# Allegro board VESC_DEVICE.brd
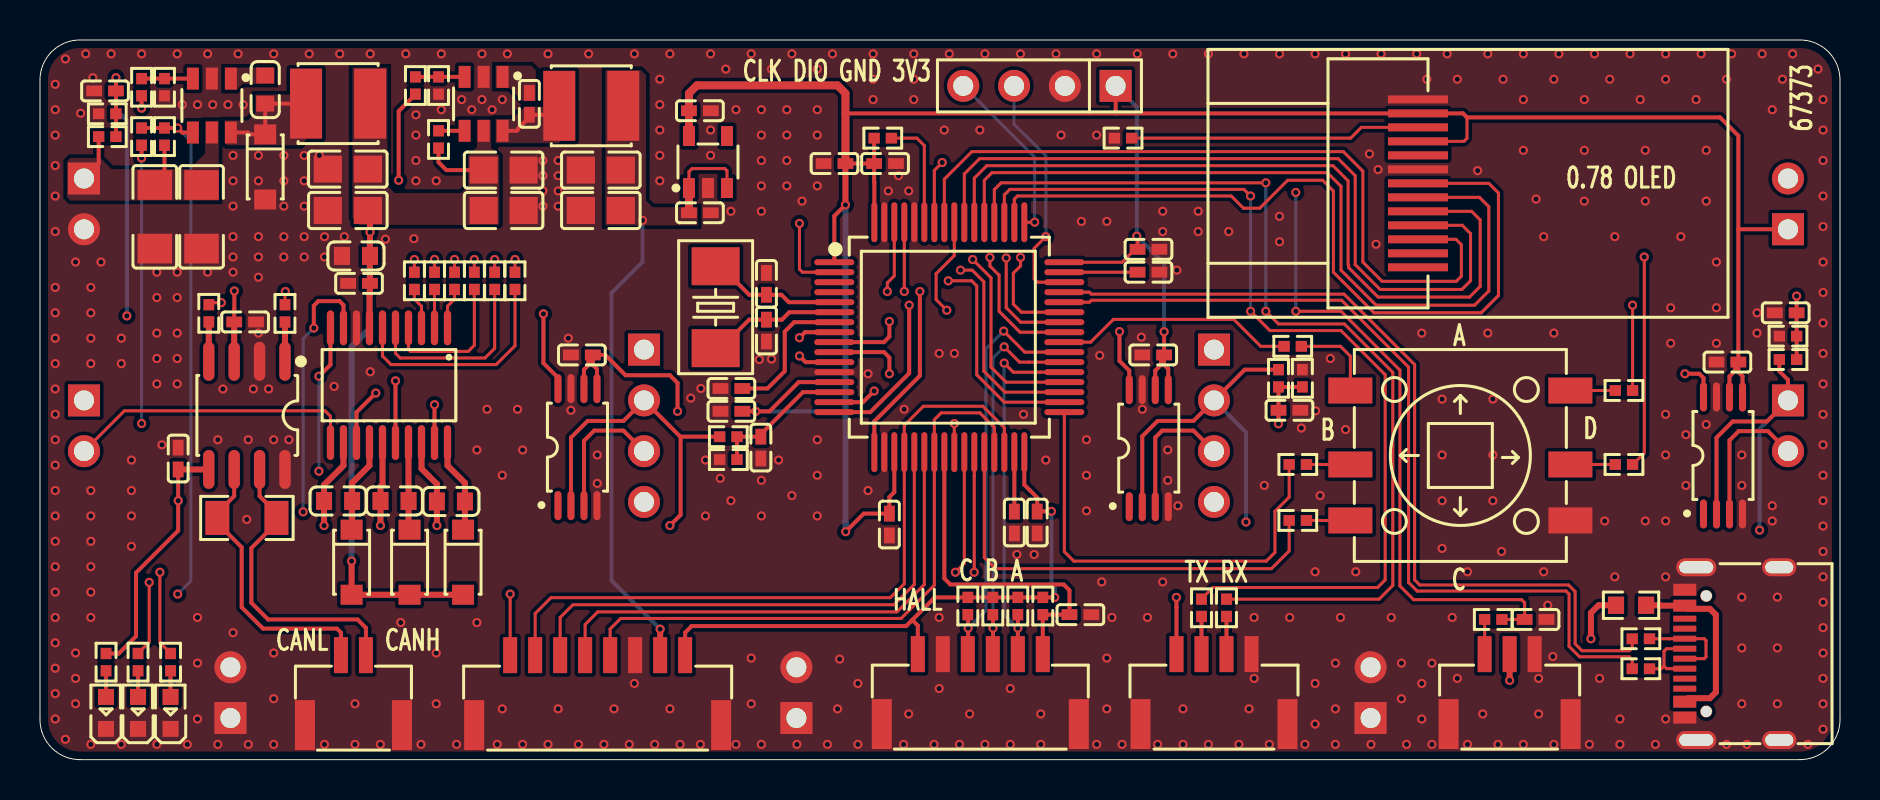
[diagram p0: board, top side]
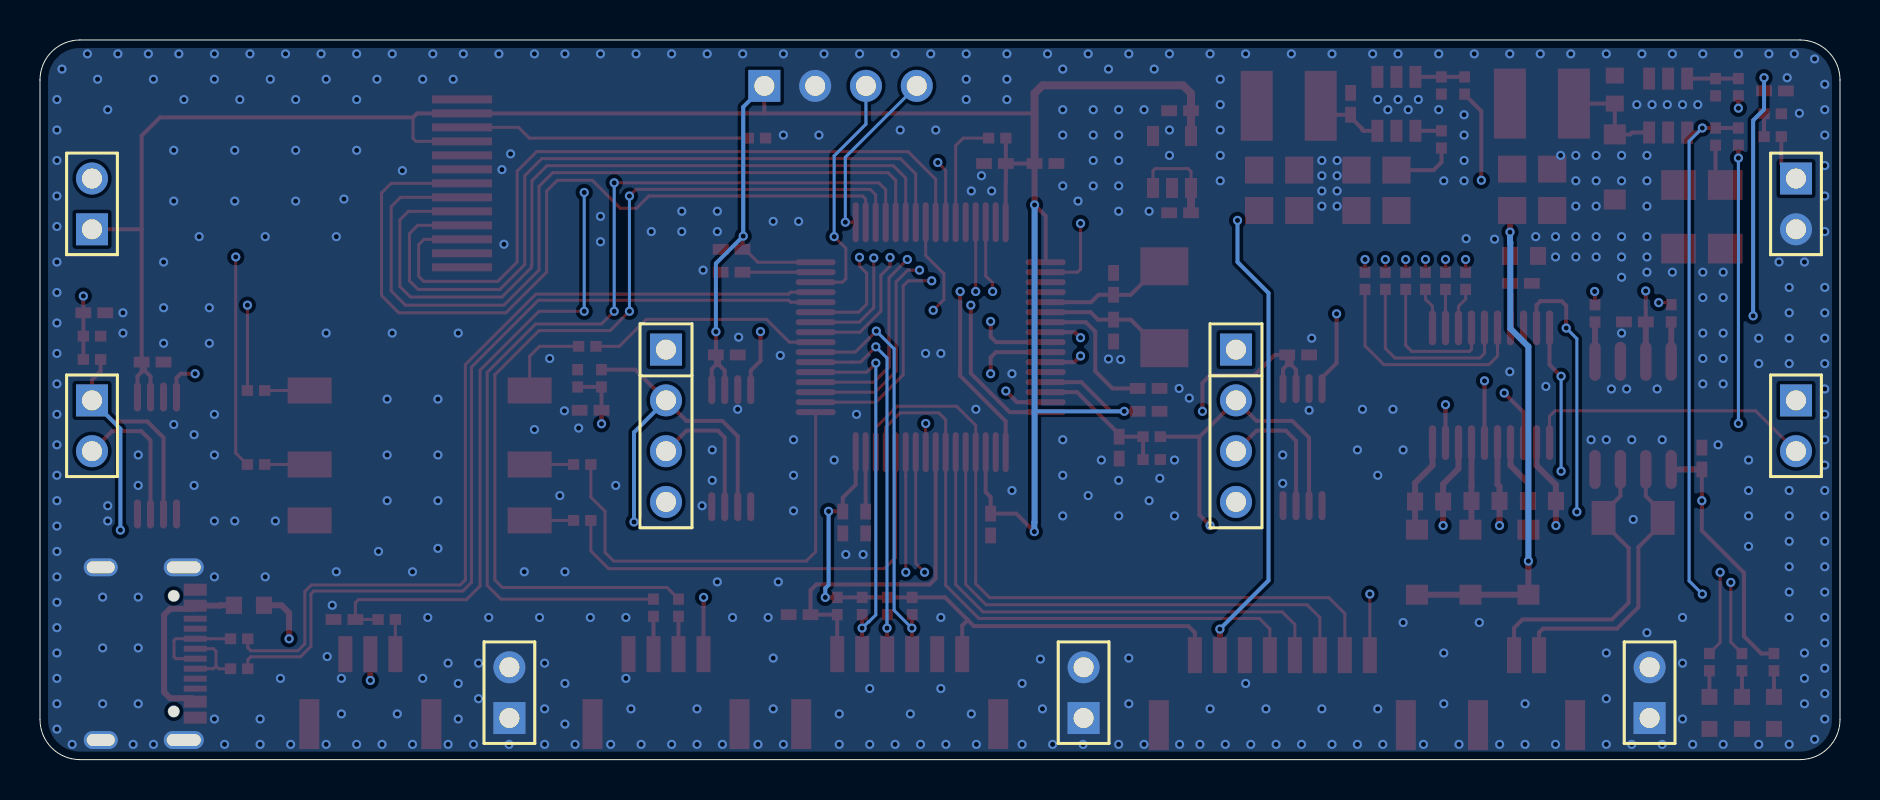
[diagram p1: board, bottom side, seen from below]

Outline 90 x 36 mm; copper layers: TOP, LAYER_1, LAYER_2, BOTTOM. Coordinates in mm from the lower left corner of the outline.
Outline path: 0,34 0,2 arc(0.59,0.59) 2,0 88,0 arc(89.41,0.59) 90,2 90,34 arc(89.41,35.41) 88,36 2,36 arc(0.59,35.41) 0,34

## Design rules (mm)
constraint set DEFAULT: min track width 0.152
net group USB: nets USB_DM USB_DP

## Placement (name value [footprint] x y rotation side)
C1  15pF/50V  [C0402]  36.32 23.8 270 top
C2  15pF/50V  [C0402]  36.32 21.46 90 top
C3  2.2uF/50V  [C0603]  14.9 12.94 0 top
C4  2.2uF/50V  [C0603]  17.73 12.94 0 top
C5  100nF/50V  [C0402]  34.57 18.57 180 top
C6  2.2uF/50V  [C0603]  20.55 12.91 0 top
C7  10uF/16V  [C0603]  15.8 25.2 0 top
C8  2.2uF/6.3V  [C0402]  55.42 25.53 180 top
C9  2.2uF/6.3V  [C0402]  42.47 11.76 90 top
C10  2.2uF/6.3V  [C0402]  34.57 17.42 0 top
C11  2.2uF/6.3V  [C0402]  49.86 11.86 90 top
C12  2.2nF/50V  [C0402]  27.09 20.24 0 top
C13  2.2uF/6.3V  [C0402]  42.25 29.82 180 top
C14  2.2uF/6.3V  [C0402]  39.73 29.82 0 top
C15  2.2nF/50V  [C0402]  55.66 20.24 0 top
C16  2.2uF/6.3V  [C0402]  48.72 11.86 270 top
C17  2.2uF/6.3V  [C0402]  55.42 24.38 0 top
C18  2.2nF/50V  [C0402]  84.37 19.89 0 top
C19  NC  [C0402]  36.04 15.61 90 top
C20  NC  [C0402]  62.47 17.48 180 top
C21  NC  [C0402]  87.29 22.35 0 top
C22  100nF/50V  [C0402]  3.25 33.45 0 top
C23  10nF/50V  [C0402]  24.47 32.8 90 top
C24  100nF/100V  [C0603]  11.26 33.52 90 top
C25  22uF/16V  [C0805]  23.18 29.49 0 top
C26  2.2uF/100V  [C1206]  5.74 27.15 270 top
C27  2.2uF/100V  [C1206]  8.08 27.15 270 top
C28  22uF/6.3V  [C0805]  28.04 27.47 180 top
C29  22uF/6.3V  [C0805]  28.04 29.49 180 top
C30  10uF/6.3V  [C0402]  32.99 27.36 0 top
C31  22uF/16V  [C0805]  15.39 29.54 180 top
C32  22uF/16V  [C0805]  15.39 27.47 180 top
C33  10uF/6.3V  [C0402]  32.99 32.46 0 top
C34  100nF/50V  [C0402]  74.78 7.01 180 top
C35  100nF/50V  [C0402]  52.02 7.25 0 top
C36  2.2uF/6.3V  [C0402]  10.26 21.89 180 top
C37  2.2uF/6.3V  [C0402]  6.91 15.06 90 top
C38  22uF/16V  [C0805]  23.18 27.47 0 top
C39  100nF/50V  [C0402]  15.95 23.83 0 top
CON1  OLED  [0_78OLED]  68.9 28.83 0 top
D1  DSK310  [SOD-123F]  15.58 9.88 270 top
D2  DSK310  [SOD-123F]  18.48 9.88 270 top
D3  DSK310  [SOD-123F]  21.15 9.88 270 top
D4  LED_GREEN  [LED0603]  6.53 2.34 90 top
D5  LED_RED  [LED0603]  4.9 2.34 90 top
D6  LED_BLUE  [LED0603]  3.3 2.34 90 top
D7  DSK310  [SOD-123F]  11.26 29.65 270 top
J1  4 HEADER  [ISP-4P-2_54]  49.97 33.7 180 top
J2  -  [TYPE-C_16P]  84.6 5.3 90 top
J3  1.25-4PWTDK  [SMD-4P-1_25]  58.7 3.53 0 top
J4  1.25-3PWTDK  [SMD-3P-1_25]  73.48 3.53 0 top
J5  1.25-6PWTDK  [SMD-6P-1_25]  47.02 3.53 0 top
J6  1.25-8PWTDK  [SMD-8P-1_25]  27.88 3.48 0 top
J7  1.25-2PWTDK  [SMD-2P-1_25]  15.67 3.48 0 top
J12  CON2  [PZ-2P-2_54]  2.2 27.8 270 bottom
J13  CON4  [PZ-4P-2_54]  30.2 16.7 270 bottom
J14  CON2  [PZ-2P-2_54]  87.4 27.8 90 bottom
J15  CON4  [PZ-4P-2_54]  58.7 16.7 270 bottom
J16  CON2  [PZ-2P-2_54]  87.4 16.7 270 bottom
J17  CON2  [PZ-2P-2_54]  2.2 16.7 270 bottom
J18  CON2  [PZ-2P-2_54]  9.52 3.35 90 bottom
J19  CON2  [PZ-2P-2_54]  37.82 3.35 90 bottom
J20  CON2  [PZ-2P-2_54]  66.53 3.35 90 bottom
L1  22uH_1A  [L4020]  14.9 32.82 0 top
L2  2.2uH_2A  [L4020]  27.56 32.71 0 top
R1  0R/1%  [R0402]  18.72 23.95 90 top
R2  0R/1%  [R0402]  23.75 23.95 90 top
R3  0R/1%  [R0402]  19.73 23.95 90 top
R4  0R/1%  [R0402]  22.73 23.95 90 top
R5  0R/1%  [R0402]  20.73 23.95 90 top
R6  0R/1%  [R0402]  21.72 23.95 90 top
R7  10K/1%  [R0402]  42.14 31.09 180 top
R11  39K/1%  [R0402]  34.42 16.15 180 top
R12  39K/1%  [R0402]  61.93 19.08 90 top
R13  39K/1%  [R0402]  87.4 20.02 180 top
R14  39K/1%  [R0402]  3.37 31.17 180 top
R15  2.2K/1%  [R0402]  6.53 4.88 270 top
R16  2.2K/1%  [R0402]  34.42 15.01 0 top
R17  2.2K/1%  [R0402]  4.9 4.88 270 top
R18  2.2K/1%  [R0402]  63.12 19.08 270 top
R19  2.2K/1%  [R0402]  87.4 21.18 0 top
R20  2.2K/1%  [R0402]  3.37 32.31 0 top
R21  2.2K/1%  [R0402]  3.3 4.88 270 top
R22  100K/1%  [R0402]  6.22 31.17 270 top
R23  120K/1%  [R0402]  5.08 33.64 270 top
R24  100K/1%  [R0402]  19.93 31.02 90 top
R25  100K/1%  [R0402]  18.77 33.72 270 top
R26  8.2K/1%  [R0402]  6.22 33.64 90 top
R27  13.7K/1%  [R0402]  19.93 33.72 90 top
R28  NC  [R0603]  79.55 7.72 180 top
R29  22R/1%  [R0402]  58.08 7.59 90 top
R30  22R/1%  [R0402]  59.32 7.59 90 top
R31  22R/1%  [R0402]  80.04 6.05 180 top
R32  22R/1%  [R0402]  80.04 4.55 180 top
R33  100R/1%  [R0402]  72.66 7.01 0 top
R34  10K/1%  [R0402]  50.14 7.68 90 top
R35  4.7K/1%  [R0402]  48.89 7.68 90 top
R36  4.7K/1%  [R0402]  47.64 7.68 90 top
R37  4.7K/1%  [R0402]  46.39 7.68 90 top
R38  NC_10K/1%  [R0402]  5.08 31.17 90 top
R39  120R/1%  [R1206]  10.34 12.09 180 top
R40  0R/1%  [R0402]  12.25 22.32 90 top
R41  0R/1%  [R0402]  8.44 22.33 90 top
R42  10R/1%  [R0402]  54.15 31.09 180 top
R43  100R/1%  [R0402]  62.64 20.68 180 top
R44  100R/1%  [R0402]  62.89 14.76 180 top
R45  100R/1%  [R0402]  62.89 11.96 180 top
R46  100R/1%  [R0402]  79.2 14.76 180 top
R47  100R/1%  [R0402]  79.2 18.46 180 top
SW1  SW_TM_2027  [SW_SMD_6P_10X10]  71.02 15.21 0 top
U1  STM32F405RGT6  [LQFP64_10X10_05P]  45.47 21.13 270 top
U2  FD6288T  [TSSOP-20]  17.45 18.73 180 top
U3  INA240A1PWR  [TSSOP-8]  26.87 15.63 0 top
U4  INA240A1PWR  [TSSOP-8]  55.44 15.58 0 top
U5  INA240A1PWR  [TSSOP-8]  84.15 15.21 0 top
U6  LMR16006XDDCR  [SOT-23-6]  8.59 32.72 90 top
U7  LP6460B6F  [SOT-23-6]  22.18 32.8 90 top
U8  XC6219B332MR  [SOT-23-5]  33.4 29.9 270 top
U9  TJA1042T/1J  [SOP-8]  10.34 17.22 180 top
Y1  8M  [SMD5032-2P]  33.78 22.63 90 top

## Library data of the parts
C1-C39 = CAP NP
CON1 = OLED
D1-D3 D7 = DIODE SCHOTTKY21
D4-D6 = LED
J1 = 4 HEADER
J2 = TYPE-C_16P
J3 = 1.25-4PWTDK
J4 = 1.25-3PWTDK
J5 = 1.25-6PWTDK
J6 = 1.25-8PWTDK
J7 = 1.25-2PWTDK
J12 J14 J16-J20 = CON2
J13 J15 = CON4
L1 L2 = INDUCTOR
R1-R7 R11-R47 = RESISTOR
SW1 = SW_TM_2027
U1 = STM32F405RGT6
U2 = FD6288T
U3-U5 = INA240A1PWR
U6 = LMR16006XDDCR
U7 = LP6460B6F
U8 = XC6219B332MR
U9 = TJA1042T/1J
Y1 = CRYSTAL

## Footprints (pads in the part's own frame, mm; a bottom-side part is the same pattern mirrored in y, then rotated)
0_78OLED
  rect 3x0.4 smd: 1(0,-4.2) 2(0,-3.5) 3(0,-2.8) 4(0,-2.1) 5(0,-1.4) 6(0,-0.7) 7(0,0) 8(0,0.7) 9(0,1.4) 10(0,2.1) 11(0,2.8) 12(0,3.5) 13(0,4.2)
C0402
  rect 0.79x0.541 smd: 1(-0.546,0) 2(0.546,0)
C0603
  rect 0.8x0.899 smd: 1(-0.701,0) 2(0.701,0)
C0805
  rect 1.41x1.349 smd: 1(-1.001,0) 2(1.001,0)
C1206
  rect 1.486x1.727 smd: 1(-1.593,0) 2(1.59,0)
ISP-4P-2_54
  rect 1.6x1.6 hole 1: 1(-3.81,0)
  round 1.6 hole 1: 2(-1.27,0) 3(1.27,0) 4(3.81,0)
L4020
  rect 1.6x3.5 smd: 1(-1.6,0) 2(1.6,0)
LED0603
  rect 0.8x0.8 smd: 1(-0.8,0) 2(0.8,0)
LQFP64_10X10_05P
  oval 0.3x1.999 smd: 1(-3.749,-5.751) 2(-3.251,-5.751) 3(-2.751,-5.751) 4(-2.25,-5.751) 5(-1.75,-5.751) 6(-1.25,-5.751) 7(-0.749,-5.751) 8(-0.249,-5.751) 9(0.249,-5.751) 10(0.749,-5.751) 11(1.25,-5.751) 12(1.75,-5.751) 13(2.25,-5.751) 14(2.751,-5.751) 15(3.251,-5.751) 16(3.749,-5.751) 33(3.749,5.751) 34(3.251,5.751) 35(2.751,5.751) 36(2.25,5.751) 37(1.75,5.751) 38(1.25,5.751) 39(0.749,5.751) 40(0.249,5.751) 41(-0.249,5.751) 42(-0.749,5.751) 43(-1.25,5.751) 44(-1.75,5.751) 45(-2.25,5.751) 46(-2.751,5.751) 47(-3.251,5.751) 48(-3.749,5.751)
  oval 1.999x0.3 smd: 17(5.751,-3.749) 18(5.751,-3.251) 19(5.751,-2.751) 20(5.751,-2.25) 21(5.751,-1.75) 22(5.751,-1.25) 23(5.751,-0.749) 24(5.751,-0.249) 25(5.751,0.249) 26(5.751,0.749) 27(5.751,1.25) 28(5.751,1.75) 29(5.751,2.25) 30(5.751,2.751) 31(5.751,3.251) 32(5.751,3.749) 49(-5.751,3.749) 50(-5.751,3.251) 51(-5.751,2.751) 52(-5.751,2.25) 53(-5.751,1.75) 54(-5.751,1.25) 55(-5.751,0.749) 56(-5.751,0.249) 57(-5.751,-0.249) 58(-5.751,-0.749) 59(-5.751,-1.25) 60(-5.751,-1.75) 61(-5.751,-2.25) 62(-5.751,-2.751) 63(-5.751,-3.251) 64(-5.751,-3.749)
PZ-2P-2_54
  rect 1.6x1.6 hole 1: 1(-1.27,0)
  round 1.6 hole 1: 2(1.27,0)
PZ-4P-2_54
  rect 1.6x1.6 hole 1: 1(-3.81,0)
  round 1.6 hole 1: 2(-1.27,0) 3(1.27,0) 4(3.81,0)
R0402
  rect 0.566x0.541 smd: 1(-0.432,0) 2(0.432,0)
R0603
  rect 0.805x0.864 smd: 1(-0.752,0) 2(0.752,0)
R1206
  rect 1.199x1.699 smd: 1(-1.478,0) 2(1.478,0)
SMD5032-2P
  rect 1.9x2.4 smd: 1(-2.05,0) 2(2.05,0)
SMD-2P-1_25
  rect 0.701x1.801 smd: 1(-0.625,1.75) 2(0.625,1.75)
  rect 1.001x2.499 smd: 3(-2.426,-1.75) 4(2.426,-1.75)
SMD-3P-1_25
  rect 0.701x1.801 smd: 1(-1.25,1.75) 2(0,1.75) 3(1.25,1.75)
  rect 1.001x2.499 smd: 4(-3.05,-1.75) 5(3.05,-1.75)
SMD-4P-1_25
  rect 0.701x1.801 smd: 1(-1.875,1.75) 2(-0.625,1.75) 3(0.625,1.75) 4(1.875,1.75)
  rect 1.001x2.499 smd: 5(-3.675,-1.75) 6(3.675,-1.75)
SMD-6P-1_25
  rect 0.701x1.801 smd: 1(-3.124,1.75) 2(-1.875,1.75) 3(-0.625,1.75) 4(0.625,1.75) 5(1.875,1.75) 6(3.124,1.75)
  rect 1.001x2.499 smd: 7(-4.925,-1.75) 8(4.925,-1.75)
SMD-8P-1_25
  rect 0.701x1.801 smd: 1(-4.374,1.75) 2(-3.124,1.75) 3(-1.875,1.75) 4(-0.625,1.75) 5(0.625,1.75) 6(1.875,1.75) 7(3.124,1.75) 8(4.374,1.75)
  rect 1.001x2.499 smd: 9(-6.175,-1.75) 10(6.175,-1.75)
SOD-123F
  rect 1.001x1.1 smd: 1(-1.628,0) 2(1.628,0)
SOP-8
  oval 0.569x1.951 smd: 1(-1.905,-2.705) 2(-0.635,-2.705) 3(0.635,-2.705) 4(1.905,-2.705) 5(1.905,2.705) 6(0.635,2.705) 7(-0.635,2.705) 8(-1.905,2.705)
SOT-23-5
  rect 1.001x0.599 smd: 1(1.3,-0.95) 2(1.3,0) 3(1.3,0.95) 4(-1.3,0.95) 5(-1.3,-0.95)
SOT-23-6
  rect 1.1x0.599 smd: 1(1.349,-0.95) 2(1.349,0) 3(1.349,0.95) 4(-1.349,0.95) 5(-1.349,0) 6(-1.349,-0.95)
SW_SMD_6P_10X10
  rect 2.2x1.3 smd: 1(-5.5,3.25) 2(-5.5,-0.45) 3(-5.5,-3.25) 4(5.5,-3.25) 5(5.5,-0.45) 6(5.5,3.25)
TSSOP-8
  oval 0.353x1.453 smd: 1(-0.975,-2.926) 2(-0.325,-2.926) 3(0.325,-2.926) 4(0.975,-2.926) 5(0.975,2.926) 6(0.325,2.926) 7(-0.325,2.926) 8(-0.975,2.926)
TSSOP-20
  oval 0.363x1.742 smd: 1(-2.926,-2.87) 2(-2.276,-2.87) 3(-1.626,-2.87) 4(-0.975,-2.87) 5(-0.325,-2.87) 6(0.325,-2.87) 7(0.975,-2.87) 8(1.626,-2.87) 9(2.276,-2.87) 10(2.926,-2.87) 11(2.926,2.87) 12(2.276,2.87) 13(1.626,2.87) 14(0.975,2.87) 15(0.325,2.87) 16(-0.325,2.87) 17(-0.975,2.87) 18(-1.626,2.87) 19(-2.276,2.87) 20(-2.926,2.87)
TYPE-C_16P
  round 0.599 hole 0.551 unplated: (-2.89,1.288) (2.89,1.288)
  oval 0.899x1.999 hole 0.599x1.699: 1(-4.321,1.788) 2(4.321,1.788)
  oval 0.899x1.699 hole 0.599x1.399: 3(-4.321,-2.362) 4(4.321,-2.362)
  rect 0.599x1.151 smd: A1B12(-3.2,2.362) A4B9(-2.4,2.362) B1A12(3.2,2.362) B4A9(2.4,2.362)
  rect 0.3x1.151 smd: A5(-1.25,2.362) A6(-0.249,2.362) A7(0.249,2.362) A8(1.25,2.362) B5(1.75,2.362) B6(0.749,2.362) B7(-0.749,2.362) B8(-1.75,2.362)

## Nets
3V3: C8.2 C9.2 C10.2 C11.2 C12.2 C13.2 C14.2 C15.2 C18.2 C33.1 C37.1 CON1.10(VCC) CON1.12 J1.1 J3.1 J5.1 J6.8 J14.1 R7.2 R21.1 R34.2 R35.2 R36.2 R37.2 U1.1 U1.13 U1.19 U1.32 U1.48 U1.64 U3.5(VS) U3.6 U4.5(VS) U4.6 U5.5(VS) U5.6 U8.5(VOUT) U9.5
5V: C28.1 C29.1 C30.1 C36.2 J4.2 J6.7 L2.2 R25.2 R28.2 U8.1 U8.3 U9.3(VCC)
12V: C7.2 C25.1 C31.1 C32.1 C38.1 C39.2 D1.2 D2.2 D3.2 L1.2 R23.2 R24.1 U2.7 U7.5(VIN)
GND: C1.1 C2.1 C5.2 C7.1 C8.1 C9.1 C10.1 C11.1 C12.1 C13.1 C14.1 C15.1 C16.2 C17.2 C18.1 C19.1 C20.1 C21.1 C22.1 C25.2 C26.2 C27.2 C28.2 C29.2 C30.2 C31.2 C32.2 C33.2 C34.1 C35.2 C36.1 C37.2 C38.2 C39.1 CON1.8 CON1.13 D4.1(CATHODE) D5.1(CATHODE) D6.1(CATHODE) D7.2 J1.2 J2.1 J2.2 J2.3 J2.4 J2.A1B12 J2.B1A12 J3.4 J3.5 J3.6 J4.3 J4.4 J4.5 J5.2 J5.7 J5.8 J6.6 J6.9 J6.10 J7.3 J7.4 J12.2 J18.1 J18.2 J19.1 J19.2 J20.1 J20.2 R16.1 R18.1 R19.1 R20.1 R26.1 R27.1 R42.2 SW1.4 U1.12(VSSA) U1.18 U1.60 U1.63 U2.8 U3.4 U3.7 U4.4 U4.7 U5.4 U5.7 U6.2 U7.2 U8.2 U9.2 U9.8
VIN: C26.1 C27.1 J12.1 R14.2 R22.2 U6.5(VIN)
ADC_TEMP: J14.2 U1.17
ADC_VIN: C22.2 R14.1 R20.2 U1.11
BUCK_EN: J6.1 R22.1 R38.2 U6.4
CAN_H: J7.2 R39.1 U9.7
CAN_L: J7.1 R39.2 U9.6
CAN_RX: R41.2 U1.61
CAN_TX: R40.2 U1.62
CURRENT_A: U1.8 U3.8
CURRENT_B: U1.9 U4.8
CURRENT_C: U1.10 U5.8
FAULT: R7.1 U1.59
GHA: J17.1 U2.19
GHB: J13.1 U2.16
GHC: J15.1 U2.13
GLA: J17.2 U2.11
GLB: J13.4 U2.10
GLC: J15.4 U2.9
HA: R5.2 U1.41
HALL_A: J5.5 R35.1 U1.37
HALL_B: J5.4 R36.1 U1.38
HALL_C: J5.3 R37.1 U1.39
HB: R3.2 U1.42
HC: R1.2 U1.43
KEY_A: R43.2 U1.40
KEY_B: R44.2 U1.33
KEY_C: R45.2 U1.28
KEY_CEN: R47.1 U1.56
KEY_D: R46.1 U1.2
LA: R6.2 U1.34
LB: R4.2 U1.35
LC: R2.2 U1.36
LED_GREEN: R15.1 U1.26
LED_RED: R17.1 U1.27
M_TEMP: C35.1 J5.6 R34.1 U1.24
MISO_ADC_EXT2: J6.4 U1.22
NRST: C5.1 U1.7
OLED_CS: CON1.7 U1.50
OLED_DC: CON1.5 U1.54
OLED_MOSI: CON1.3 U1.57
OLED_RST: CON1.6 U1.53
OLED_SCLK: CON1.4 U1.55
PHA: J13.3 U3.3
PHB: J15.3 U4.3
PHC: J16.2 U5.3
RX_SDA_NSS: J6.2 U1.20 U1.30
SCK_ADC_EXT: J6.3 U1.21
SERVO: C34.2 R33.2 U1.58
SHA: C6.1 J13.2 R11.2 U2.18 U3.2
SHB: C4.1 J15.2 R12.2 U2.15 U4.2
SHC: C3.1 J16.1 R13.2 U2.12(VS3) U5.2
SHUTDOWN: R38.1 U1.25
SWCLK: J1.4 U1.49
SWDIO: J1.3 U1.46
TX_SCL_MOSI: J6.5 U1.23 U1.29
UART_RX: R30.2 U1.52
UART_TX: R29.2 U1.51
USB_DM: R32.2 U1.44
USB_DP: R31.2 U1.45
VB1: C6.2 D3.1(K) U2.20
VB2: C4.2 D2.1(K) U2.17
VB3: C3.2 D1.1(K) U2.14
VOLTAGE_A: C19.2 R11.1 R16.2 U1.14
VOLTAGE_B: C20.2 R12.1 R18.2 U1.15
VOLTAGE_C: C21.2 R13.1 R19.2 U1.16
N223686: C1.2 U1.5 Y1.2
N223706: C2.2 U1.6 Y1.1
N224518: C16.1 U1.31
N224540: C17.1 U1.47
N252481: R6.1 U2.4
N252485: R5.1 U2.1
N252489: R4.1 U2.5
N252493: R3.1 U2.2
N252497: R2.1 U2.6
N252501: R1.1 U2.3
N258294: C23.2 U7.1
N258298: C23.1 L2.1 U7.6
N258498: R24.2 U7.4
N258502: R25.1 R27.2 U7.3
N261255: C24.1 D7.1(K) L1.1 U6.6
N261403: R23.1 R26.2 U6.3
N289757: D4.2 R15.2
N289807: D5.2 R17.2
N289865: D6.2 R21.2
N305474: J2.A4B9 J2.B4A9(VBUS#B4A9) R28.1
N305512: J2.A7 J2.B7 R32.1
N305552: J2.A6 J2.B6 R31.1
N321424: J4.1 R33.1
N322858: J3.2 R29.1
N322876: J3.3 R30.1
N2612190: C24.2 U6.1
N2979290: R40.1 U9.1
N2979293: R41.1 U9.4
N3596120: R43.1 SW1.1
N3596121: R44.1 SW1.2
N3596122: R45.1 SW1.3
N3596124: R46.2 SW1.5(D)
N3596125: R47.2 SW1.6
N35954610: CON1.11 R42.1

Pads without a net: CON1 1 2 9; J2 A5 A8 B5 B8; U1 3 4; U3 1; U4 1; U5 1; U8 4

## Via types
v1: diameter 0.457, hole 0.254, TOP to BOTTOM, 564 vias

## Routing (per net, layer and track width the routed paths; a pad name or vN(x,y) marks a point on that pad's centre or on a via; arc(x,y) is an arc through that point)
3V3: length 258.7
  TOP w0.152: 71.35,32.13 71.35,31.08 71.2,30.93 CON1.10 ; C8.2 54.75,25.53 54.11,24.88 U1.48
  TOP w0.2: U4.6 55.76,19.46 56.05,19.75 ; 40.27,32.33 40.28,32.33 53.8,32.33 ; U3.6 27.2,19.51 27.43,19.74 ; C15.2 56.05,20.09 56.05,19.75 ; C15.2 56.21,19.75 ; C15.2 v1(56.21,21.41) ; 43.61,6.98 44.74,8.11 R37.2 R36.2 R35.2 R34.2 v1(50.74,8.11) ; 43.61,6.98 43.31,6.68 32.58,6.68 32.26,6.35 J6.8 ; 43.61,6.98 43.89,6.71 J5.1 ; v1(40.28,11.4) 41.19,12.31 C9.2 42.47,13.14 42.72,13.38 U1.19 ; 84.75,19.44 84.75,19.72 C18.2 ; 84.75,19.44 84.86,19.44 84.92,19.39 ; 84.75,19.44 84.48,19.17 U5.6 ; C10.2 v1(35.79,17.42) 36.47,17.42 37.93,18.88 U1.13 ; 27.43,19.91 27.43,20.03 C12.2 ; 27.43,19.91 27.43,19.74 ; 27.43,19.91 27.6,19.91 27.65,19.86 ; v1(31.88,17.42) 31.88,18.85 31.5,19.23 29.28,19.23 28.26,20.24 C12.2 ; v1(54.84,26.19) 54.88,26.15 C8.2 ; 84.92,19.39 C18.2 ; 84.92,19.39 85.13,19.18 U5.5 ; 84.92,26.54 C18.2 ; 84.92,26.54 84.93,26.53 J14.1 ; 84.92,26.54 84.92,31.21 84,32.13 71.35,32.13 71.15,32.33 CON1.12 53.8,32.33 ; U1.32 49.22,13.75 49.86,13.11 C11.2 49.87,12.42 v1(50.57,12.42) ; C13.2 R7.2 ; C13.2 C14.2 ; C13.2 41.71,28.89 41.72,28.88 U1.64 ; 27.65,19.86 27.65,19.74 ; 27.65,19.86 27.65,20.24 C12.2 ; 27.65,19.74 27.85,19.54 U3.5 ; 27.65,19.74 27.43,19.74 ; 53.8,32.33 53.78,32.34 J1.1 ; 56.21,19.75 56.05,19.75 ; 56.21,19.75 56.41,19.54 U4.5 ; R21.1 3.94,5.31 4.8,6.17 4.8,9.35 6.91,11.46 v1(6.91,12.95) C37.1 ; v1(56.82,8.11) 56.82,7.62 56.83,7.62 J3.1 ; U1.1 39.72,27.19 v1(40.27,27.75)
  TOP w0.3: C37.1 U9.5 ; C14.2 v1(40.27,27.75)
  TOP w0.4: C14.2 40.27,33.33 39.87,33.73 32.85,33.73 32.45,33.33 C33.1 U8.5
  LAYER_2 w0.2: v1(6.91,12.95) 17.5,12.95 19.37,11.08 39.96,11.08 v1(40.28,11.4) 40.61,11.08 44,11.08 45.34,12.42 v1(50.57,12.42) ; v1(31.88,17.42) v1(35.79,17.42) ; v1(50.74,8.11) v1(56.82,8.11)
  BOTTOM w0.2: v1(50.74,8.11) 50.74,8.57 50.57,8.74 v1(50.57,12.42) ; v1(35.79,17.42) 40.22,17.42 40.27,17.37 ; v1(56.21,21.41) 56.21,24.82 v1(54.84,26.19) 54.84,32.65 J1.1
  BOTTOM w0.3: v1(40.28,11.4) 40.28,11.86 40.27,11.87 v1(40.27,27.75)
5V: length 114.8
  TOP w0.152: U8.1 32.45,29.41 32.6,29.57 34.24,29.57 34.35,29.46 U8.3
  TOP w0.2: C36.2 9.71,22.56 9.72,22.57 v1(9.72,23.44) ; v1(17.93,28.98) 17.93,32.44 18.77,33.28 R25.2
  TOP w0.3: J4.2 v1(73.48,3.96) ; R28.2 77.93,7.72 77.55,7.34 v1(77.55,6.05) ; v1(31.01,6.53) J6.7 ; C36.2 U9.3
  TOP w0.4: C30.1 U8.1
  LAYER_2 w0.2: v1(73.48,3.96) 73.48,6.02 ; 73.48,6.02 73.46,6 31.53,6 v1(31.01,6.53) ; 73.48,6.02 73.51,6.05 v1(77.55,6.05) ; 17.93,26.92 17.98,26.97 v1(30.12,26.97) ; 17.93,26.92 17.93,24.33 17.63,24.03 11.84,24.03 11.25,23.44 v1(9.72,23.44) ; 17.93,26.92 v1(17.93,28.98)
  BOTTOM w0.2: v1(31.01,6.53) 28.57,8.96 28.57,23.34 30.12,24.89 v1(30.12,26.97)
12V: length 50.3
  TOP w0.2: C25.1 20.32,29.49 19.93,29.88 R24.1 ; R23.2 v1(5.08,32.59)
  TOP w0.3: C32.1 16.5,27.36 v1(16.5,26.39) C7.2 16.5,24.47 16.5,24.47 C39.2 16.5,23.28 16.47,23.25 U2.7 ; D3.2 D2.2 D1.2 v1(15.58,9.93)
  TOP w0.4: 16.48,27.05 16.47,27.04
  LAYER_2 w0.2: v1(5.08,32.59) 5.79,31.88 5.79,27.58 6.38,27 15.89,27 v1(16.5,26.39)
  BOTTOM w0.3: v1(16.5,26.39) 16.5,25.89 16.48,25.87 16.48,21.56 15.58,20.66 v1(15.58,9.93)
GND:
  vias: v1(0.76,33.78) v1(0.76,32.51) v1(0.76,31.24) v1(0.76,29.72) v1(0.76,28.19) v1(0.76,26.42) v1(0.76,23.62) v1(0.76,22.35) v1(0.76,21.08) v1(0.76,19.81) v1(0.76,18.54) v1(0.76,17.27) v1(0.76,16) v1(0.76,14.73) v1(0.76,13.46) v1(0.76,12.19) v1(0.76,10.92) v1(0.76,9.65) v1(0.76,8.38) v1(0.76,7.11) v1(0.76,5.84) v1(0.76,4.57) v1(0.76,3.3) v1(0.76,2.03) v1(1.27,35.05) v1(1.27,1.02) v1(1.78,24.89) v1(1.78,5.33) v1(1.78,4.06) v1(1.78,2.79) v1(2.03,32.33) v1(2.29,35.31) v1(2.54,23.62) v1(2.54,22.35) v1(2.54,21.08) v1(2.54,19.81) v1(2.54,13.46) v1(2.54,12.19) v1(2.54,10.92) v1(2.54,9.65) v1(2.54,8.38) v1(2.54,7.11) v1(2.54,0.76) v1(2.64,34.11) v1(3.05,24.89) v1(3.56,35.31) v1(4.06,21.08) v1(4.06,19.81) v1(4.06,0.76) v1(4.57,14.99) v1(4.57,13.46) v1(4.57,12.19) v1(4.57,10.67) v1(5.08,35.31) v1(5.84,24.38) v1(5.84,23.11) v1(5.84,21.34) v1(5.84,20.07) v1(5.84,18.8) v1(5.84,0.76) v1(6.1,15.75) v1(6.86,35.31) v1(6.86,24.38) v1(6.86,23.11) v1(6.86,21.34) v1(6.86,20.07) v1(6.86,18.8) v1(7.11,32.77) v1(7.37,0.76) v1(7.87,32.77) v1(7.87,7.11) v1(7.87,4.83) v1(7.87,2.03) v1(8.38,35.31) v1(8.38,24.38) v1(8.64,32.77) v1(8.89,16) v1(8.89,0.76) v1(9.14,18.54) v1(9.4,32.77) v1(9.65,30.23) v1(9.65,28.96) v1(9.65,27.69) v1(9.65,26.16) v1(9.65,25.15) v1(9.65,24.38) v1(9.65,6.35) v1(9.91,35.31) v1(10.16,32.77) v1(10.34,12.01) v1(10.41,16) v1(10.41,0.76) v1(10.67,18.54) v1(10.92,30.23) v1(10.92,28.96) v1(10.92,26.16) v1(10.92,25.15) v1(10.92,24.13) v1(10.92,21.34) v1(11.43,18.54) v1(11.68,35.31) v1(11.68,16) v1(11.68,5.33) v1(11.68,3.05) v1(11.68,0.76) v1(12.19,30.23) v1(12.19,28.96) v1(12.19,27.69) v1(12.19,26.16) v1(12.19,25.15) v1(12.45,16) v1(13.21,30.23) v1(13.21,28.96) v1(13.21,27.69) v1(13.21,26.16) v1(13.21,25.15) v1(13.46,35.31) v1(13.97,30.23) v1(14.22,26.16) v1(14.22,25.15) v1(14.22,0.76) v1(14.71,18.67) v1(14.99,35.31) v1(15.21,26.16) v1(15.75,2.79) v1(15.75,0.76) v1(16.51,35.31) v1(16.51,19.41) v1(17.02,0.76) v1(17.27,26.04) v1(18.03,6.86) v1(18.29,35.31) v1(18.69,26.06) v1(18.8,32.26) v1(18.8,31.24) v1(18.8,29.97) v1(18.8,28.96) v1(19.05,0.76) v1(19.81,28.96) v1(19.81,5.33) v1(19.81,2.79) v1(20.07,35.31) v1(20.07,32.51) v1(20.83,0.76) v1(21.08,33.02) v1(21.59,32.51) v1(21.84,15.49) v1(21.84,6.86) v1(22.1,35.31) v1(22.1,33.02) v1(22.35,17.53) v1(22.61,32.51) v1(22.86,0.76) v1(23.11,33.02) v1(23.11,14.22) v1(23.11,2.54) v1(23.37,35.31) v1(23.88,17.53) v1(24.13,15.49) v1(24.13,0.76) v1(25.15,29.97) v1(25.15,29.21) v1(25.15,28.45) v1(25.15,27.69) v1(25.4,35.31) v1(25.4,0.76) v1(25.91,29.97) v1(25.91,29.21) v1(25.91,28.45) v1(25.91,27.69) v1(25.91,2.54) v1(26.42,21.08) v1(26.54,17.48) v1(26.92,0.76) v1(27.43,35.31) v1(27.86,15.24) v1(27.86,13.82) v1(28.19,0.76) v1(28.7,2.54) v1(29.46,0.76) v1(29.72,35.31) v1(29.72,3.81) v1(30.73,0.76) v1(30.99,34.04) v1(30.99,32.77) v1(30.99,31.5) v1(30.99,30.23) v1(30.99,28.96) v1(31.5,35.31) v1(31.5,2.54) v1(32,0.76) v1(32.54,18.08) v1(33.05,18.57) v1(33.02,0.76) v1(33.27,14.99) v1(33.27,12.19) v1(33.53,35.31) v1(33.53,31.5) v1(33.53,30.23) v1(34.01,14.07) v1(34.29,34.54) v1(34.54,27.43) v1(34.54,12.95) v1(34.8,32.51) v1(34.8,0.76) v1(35.56,35.31) v1(35.56,5.08) v1(35.56,2.79) v1(35.97,20.02) v1(36.07,32.51) v1(36.07,31.24) v1(36.07,29.97) v1(36.07,28.7) v1(36.07,27.43) v1(36.07,13.97) v1(36.07,12.19) v1(36.07,0.76) v1(36.58,34.54) v1(36.58,20.04) v1(36.93,14.99) v1(37.34,32.51) v1(37.34,31.24) v1(37.34,29.97) v1(37.34,28.7) v1(37.59,35.31) v1(37.59,13.21) v1(37.85,0.76) v1(38.1,27.94) v1(38.86,34.54) v1(38.86,32.51) v1(38.86,31.24) v1(38.86,28.7) v1(38.86,16) v1(38.86,14.22) v1(38.86,12.19) v1(39.37,0.76) v1(39.62,35.31) v1(39.88,2.54) v1(39.98,5.03) v1(40.89,3.81) v1(40.89,0.76) v1(41.4,19.3) v1(41.4,13.46) v1(41.66,35.31) v1(41.66,34.04) v1(41.66,33.02) v1(42.42,28.45) v1(42.93,29.21) v1(43.21,17.53) v1(43.18,0.76) v1(43.43,28.45) v1(43.43,2.29) v1(43.69,35.31) v1(43.69,34.04) v1(43.69,33.02) v1(44.7,0.76) v1(44.96,20.32) v1(44.96,7.11) v1(44.96,3.56) v1(45.21,31.5) v1(45.47,35.31) v1(45.72,20.32) v1(45.97,0.76) v1(46.48,2.29) v1(46.99,31.5) v1(47.24,35.31) v1(47.24,0.76) v1(48.51,3.56) v1(48.51,0.76) v1(48.84,10.26) v1(49.02,35.31) v1(49.17,17.27) v1(49.71,10.26) v1(50.04,2.29) v1(50.04,0.76) v1(50.29,14.99) v1(50.8,35.31) v1(51.05,31.24) v1(52.07,26.92) v1(52.32,16) v1(52.32,14.22) v1(52.32,12.45) v1(52.83,35.31) v1(52.83,31.24) v1(52.83,0.76) v1(52.98,20.22) v1(53.09,8.89) v1(53.34,26.92) v1(53.34,5.08) v1(53.34,2.54) v1(53.59,7.11) v1(54.1,0.76) v1(54.86,35.31) v1(55.07,21.13) v1(55.12,17.53) v1(55.37,7.11) v1(55.88,0.76) v1(56.13,27.43) v1(56.13,26.42) v1(56.13,8.89) v1(56.39,15.49) v1(56.39,13.97) v1(56.64,35.31) v1(56.85,24.49) v1(56.9,12.7) v1(57.15,2.54) v1(57.15,0.76) v1(57.91,27.43) v1(57.91,26.42) v1(58.42,35.31) v1(58.42,0.76) v1(59.44,26.42) v1(59.94,0.76) v1(60.2,35.31) v1(60.45,2.54) v1(60.71,7.11) v1(60.71,4.06) v1(61.21,13.72) v1(61.47,0.76) v1(61.98,35.31) v1(61.98,27.18) v1(61.98,25.91) v1(62.48,7.11) v1(63.07,16.59) v1(63.25,0.76) v1(63.75,35.31) v1(63.78,17.45) v1(63.75,9.4) v1(63.75,3.81) v1(63.75,1.78) v1(64.01,13.21) v1(64.52,20.07) v1(64.77,4.83) v1(64.77,2.54) v1(64.77,0.76) v1(65.02,7.11) v1(65.28,35.31) v1(65.28,16.51) v1(65.79,9.4) v1(66.47,30.3) v1(66.55,0.76) v1(66.8,25.78) v1(66.9,29.51) v1(67.06,35.31) v1(67.56,7.11) v1(68.07,4.83) v1(68.07,3.05) v1(68.33,0.76) v1(68.83,35.31) v1(69.09,21.34) v1(69.09,3.81) v1(69.09,2.03) v1(69.34,34.04) v1(69.6,4.83) v1(69.6,0.76) v1(70.1,18.03) v1(70.1,15.24) v1(70.1,12.95) v1(70.1,10.57) v1(70.36,35.31) v1(70.61,7.11) v1(70.87,34.04) v1(70.87,4.06) v1(71.37,9.4) v1(71.37,0.76) v1(71.88,29.46) v1(72.14,2.29) v1(72.39,35.31) v1(72.39,21.34) v1(72.64,18.03) v1(72.64,15.24) v1(72.64,12.95) v1(72.9,0.76) v1(73.08,10.41) v1(73.15,34.04) v1(74.17,35.31) v1(74.17,33.02) v1(74.17,30.48) v1(74.17,0.76) v1(74.8,28.04) v1(74.93,4.06) v1(74.93,2.29) v1(75.18,26.16) v1(75.18,9.4) v1(75.39,7.72) v1(75.64,5.16) v1(75.69,34.04) v1(75.69,21.34) v1(75.69,0.76) v1(75.95,35.31) v1(77.22,33.02) v1(77.22,30.48) v1(77.22,27.94) v1(77.47,0.76) v1(77.72,35.31) v1(77.98,4.06) v1(78.23,11.94) v1(78.49,34.04) v1(78.74,26.16) v1(78.74,9.14) v1(78.99,2.03) v1(78.99,0.76) v1(79.5,35.31) v1(80.01,33.02) v1(80.26,30.48) v1(80.26,27.94) v1(80.26,11.94) v1(80.77,0.76) v1(81.28,35.31) v1(81.28,34.04) v1(81.28,17.27) v1(81.28,15.24) v1(81.28,11.94) v1(81.28,9.14) v1(81.28,2.03) v1(81.53,22.61) v1(81.53,20.83) v1(82.04,26.16) v1(82.3,16.26) v1(82.3,13.72) v1(82.8,33.02) v1(83.06,35.31) v1(83.31,30.48) v1(83.31,27.94) v1(83.31,16.76) v1(83.82,24.89) v1(83.82,22.61) v1(83.82,20.83) v1(84.33,34.04) v1(84.33,0.76) v1(84.58,35.31) v1(85.09,15.24) v1(85.09,13.72) v1(85.09,8.13) v1(85.09,5.59) v1(85.09,2.79) v1(85.34,0.76) v1(85.85,22.35) v1(85.85,21.34) v1(86.11,35.31) v1(86.61,32.51) v1(86.61,12.7) v1(86.61,11.94) v1(86.87,8.13) v1(86.87,5.59) v1(86.87,2.79) v1(87.12,34.04) v1(87.63,35.31) v1(88.39,0.76) v1(88.9,34.54) v1(89.15,33.02) v1(89.15,31.5) v1(89.15,29.97) v1(89.15,28.19) v1(89.15,26.67) v1(89.15,24.89) v1(89.15,23.37) v1(89.15,21.84) v1(89.15,20.32) v1(89.15,18.8) v1(89.15,17.27) v1(89.15,15.75) v1(89.15,14.22) v1(89.15,12.95) v1(89.15,11.68) v1(89.15,10.41) v1(89.15,9.14) v1(89.15,7.87) v1(89.15,6.6) v1(89.15,5.33) v1(89.15,4.06) v1(89.15,2.79) v1(89.15,1.52)
VIN: length 4.6
  TOP w0.2: R14.2 2.93,29.8 J12.1 ; C26.1 6.22,29.23 R22.2
ADC_TEMP: length 57.1
  TOP w0.2: v1(43.99,23.42) 43.99,19.2 41.72,16.93 U1.17
  LAYER_2 w0.2: J14.2 86.04,29.07 85.34,28.37 85.34,24.36 84.86,23.87 46.2,23.87 45.75,23.42 v1(43.99,23.42)
ADC_VIN: length 51.6
  TOP w0.2: v1(37.97,20.19) 38.28,19.88 U1.11 ; v1(3.8,34.11) C22.2 R20.2 R14.1
  LAYER_2 w0.2: v1(37.97,20.19) 36.32,21.84 25.81,21.84 25.63,21.67 24.84,21.67 24.31,22.2 v1(4.34,22.2)
  BOTTOM w0.2: v1(4.34,22.2) 4.34,31.98 3.8,32.52 v1(3.8,34.11)
BUCK_EN: length 46.2
  TOP w0.152: J6.1 v1(23.51,8.28)
  TOP w0.2: R38.2 R22.1 v1(6.88,31.6) 6.89,31.6 7.12,31.37 U6.4
  LAYER_2 w0.152: v1(23.51,8.28) v1(6.88,8.28)
  BOTTOM w0.152: v1(6.88,8.28) 7.54,8.94 7.54,30.94 v1(6.88,31.6)
CAN_H: length 15.2
  TOP w0.2: J7.2 16.3,6.59 15.88,7.01 11.4,7.01 10.57,7.85 10.57,10.58 11.82,11.84 R39.1 11.82,12.34 10.98,13.18 U9.7
CAN_L: length 14.4
  TOP w0.2: U9.6 9.71,13.18 8.87,12.34 R39.2 8.87,11.84 10.08,10.62 10.08,7.62 11.15,6.55 14.85,6.55 15.05,6.35 15.05,5.23
CAN_RX: length 38.5
  TOP w0.152: U1.61 v1(43.22,23.42) ; R41.2 8.54,22.86 v1(9.07,22.86)
  LAYER_2 w0.152: v1(43.22,23.42) 42.66,22.86 v1(9.07,22.86)
CAN_TX: length 34.4
  TOP w0.152: U1.62 42.72,24.2 42.37,23.85 v1(42.37,23.42) ; R40.2 12.25,23.4 v1(12.27,23.42)
  LAYER_2 w0.152: v1(42.37,23.42) v1(12.27,23.42)
CURRENT_A: length 19.2
  TOP w0.2: v1(25.17,22.3) 25.17,19.83 25.9,19.11 U3.8 ; U1.8 38.25,21.38 v1(37.97,21.11)
  LAYER_2 w0.2: v1(37.97,21.11) 36.78,22.3 v1(25.17,22.3)
CURRENT_B: length 19.1
  TOP w0.2: U1.9 42.19,20.88 42.47,21.16 v1(42.47,21.92) ; U4.8 54.46,19.46 53.98,19.95 v1(53.98,21.41)
  LAYER_2 w0.2: v1(42.47,21.92) 46.25,21.92 47.04,22.71 52.68,22.71 v1(53.98,21.41)
CURRENT_C: length 45.4
  TOP w0.2: v1(42.47,19.3) 42.47,20.12 42.2,20.38 U1.10 ; U5.8 83.17,19.09 82.97,19.3 v1(82.25,19.3)
  LAYER_2 w0.2: v1(42.47,19.3) v1(82.25,19.3)
FAULT: length 5.6
  TOP w0.152: U1.59 44.22,30.71 43.84,31.09 R7.1
GHA: length 19.5
  TOP w0.2: U2.19 v1(19.73,17.75)
  LAYER_2 w0.152: v1(19.73,17.75) 3.68,17.75 3.47,17.97 J17.1
GHB: length 16.2
  TOP w0.2: U2.16 v1(17.77,18.95)
  LAYER_2 w0.152: J13.1 28.64,18.95 v1(17.77,18.95)
GHC: length 47.2
  TOP w0.2: v1(16.79,18.34) 15.82,17.37 U2.13
  LAYER_2 w0.152: v1(16.79,18.34) 28.63,18.34 29.51,19.23 38.1,19.23 40.23,21.36 46.51,21.36 47.45,22.3 52.3,22.3 54.09,20.51 J15.1
GLA: length 14.6
  TOP w0.152: U2.11 14.52,17.18 14.25,17.45 4.22,17.45 J17.2
GLB: length 24.8
  TOP w0.2: v1(13.94,19.18) 14.52,19.76 U2.10
  LAYER_2 w0.152: v1(13.94,14.43) 14.86,13.51 17.81,13.51 19.02,12.29 28.24,12.29 28.84,12.89 J13.4
  BOTTOM w0.152: v1(13.94,19.18) v1(13.94,14.43)
GLC: length 60.5
  TOP w0.2: v1(13.69,21.59) 13.69,22.71 13.92,22.94 14.97,22.94 15.17,22.74 U2.9
  LAYER_2 w0.152: v1(13.16,12.4) 17.4,12.4 19.15,10.64 44.3,10.64 45.54,11.89 57.7,11.89 J15.4
  BOTTOM w0.152: v1(13.16,12.4) 13.16,21.06 v1(13.69,21.59)
HA: length 34.4
  TOP w0.152: U1.41 49,21.38 47.96,22.43 47.96,24.23 47.5,24.69 v1(47.5,25.12) ; R5.2 v1(20.73,25.02)
  LAYER_2 w0.152: v1(47.5,25.12) 47.04,25.58 21.28,25.58 v1(20.73,25.02)
HALL_A: length 18.7
  TOP w0.152: v1(48.21,19.84) 48.67,19.38 50.01,19.38 50.01,19.38 U1.37
  TOP w0.2: R35.1 48.9,7.25 v1(48.9,6.58) 48.9,5.28 J5.5
  BOTTOM w0.152: v1(48.9,6.58) 48.59,6.88 48.56,6.88 48.21,7.24 v1(48.21,19.84)
HALL_B: length 19.6
  TOP w0.152: U1.38 49.44,19.88 49.43,19.88 48.97,19.88 v1(48.21,20.65)
  TOP w0.2: J5.4 47.65,5.29 v1(47.65,6.58) 47.65,7.24 R36.1
  BOTTOM w0.152: v1(48.21,20.65) 47.65,20.09 v1(47.65,6.58)
HALL_C: length 21.1
  TOP w0.152: U1.39 49.24,20.38 v1(48.18,21.44)
  TOP w0.2: J5.3 46.41,5.29 v1(46.41,6.58) 46.41,7.24 R37.1
  BOTTOM w0.152: v1(48.18,21.44) 47.29,20.55 47.29,7.47 v1(46.41,6.58)
HB: length 35.6
  TOP w0.152: v1(48.31,25.1) 48.31,22.61 49.03,21.88 U1.42 ; R3.2 v1(19.73,25.02)
  LAYER_2 w0.152: v1(19.73,25.02) 20.64,25.93 47.47,25.93 v1(48.31,25.1)
HC: length 37.2
  TOP w0.152: v1(18.72,25.02) R1.2 ; v1(49.03,25.13) 49.03,24.69 48.67,24.33 48.67,22.78 49.07,22.38 U1.43
  LAYER_2 w0.152: v1(49.03,25.13) 47.84,26.31 20.02,26.31 v1(18.72,25.02)
KEY_A: length 12
  TOP w0.152: U1.40 52.53,20.88 53.67,22.02 59.69,22.02 61.04,20.68 R43.2
KEY_B: length 22.6
  TOP w0.152: U1.33 51.22,10.4 51.69,9.93 61.32,9.93 61.75,10.36 61.75,12.42 62.46,13.13 R44.2
KEY_C: length 22.6
  TOP w0.152: R45.2 62.46,10.44 61.57,9.55 47.78,9.55 47.22,10.11 U1.28
KEY_CEN: length 44
  TOP w0.152: U1.56 45.71,25.22 44.81,24.31 44.81,23.01 v1(45.34,22.48) ; R47.1 v1(79.63,22.73)
  LAYER_2 w0.152: v1(79.63,22.73) 79.22,23.14 46.89,23.14 46.23,22.48 v1(45.34,22.48)
KEY_D: length 57.7
  TOP w0.152: v1(37.97,26.82) 37.97,24.54 38.13,24.38 U1.2 ; v1(80.21,25.15) 80.21,15.34 79.64,14.76 R46.1
  LAYER_2 w0.152: v1(80.21,25.15) 50.09,25.15 48.41,26.82 v1(37.97,26.82)
LA: length 35.7
  TOP w0.152: v1(45.42,23.95) 46.58,23.95 46.84,23.7 46.84,19.25 48.21,17.88 U1.34 ; R6.2 v1(21.72,25.02)
  LAYER_2 w0.152: v1(21.72,25.02) 22.78,23.95 v1(45.42,23.95)
LB: length 34.5
  TOP w0.152: R4.2 v1(22.73,25.02) ; U1.35 48.24,18.38 47.19,19.43 47.19,23.9 46.61,24.49 v1(46.02,24.49)
  LAYER_2 w0.152: v1(22.73,25.02) 23.27,24.49 v1(46.02,24.49)
LC: length 33.3
  TOP w0.152: v1(46.63,25.02) 47.55,24.1 47.55,19.63 48.3,18.88 U1.36 ; R2.2 v1(23.75,25.02)
  LAYER_2 w0.152: v1(23.75,25.02) v1(46.63,25.02)
LED_GREEN: length 50.3
  TOP w0.152: v1(5.99,9.37) 5.99,5.85 6.53,5.32 R15.1 ; v1(45.77,9.37) 46.22,9.82 U1.26
  LAYER_2 w0.152: v1(45.77,9.37) v1(5.99,9.37)
LED_RED: length 51.3
  TOP w0.152: v1(5.46,8.86) 5.46,5.88 4.9,5.32 R17.1 ; v1(46.71,9.37) 46.71,14.17 46.72,14.18 U1.27
  LAYER_2 w0.152: v1(5.46,8.86) 46.2,8.86 v1(46.71,9.37)
M_TEMP: length 17.3
  TOP w0.2: J5.6 R34.1 C35.1 51.47,8.47 51.18,8.76 45.52,8.76 45.22,9.06 U1.24
MISO_ADC_EXT2: length 25.9
  TOP w0.152: J6.4 27.26,6.76 27.89,7.39 42.85,7.39 44.22,8.76 U1.22
NRST: length 7.1
  TOP w0.2: U1.7 37.71,21.88 37.24,21.41 37.24,19.43 36.37,18.57 C5.1
OLED_CS: length 41.1
  TOP w0.152: U1.50 48.72,28.04 48.87,28.19 59.56,28.19 60.17,27.58 60.99,27.58 62.38,28.98 64.14,28.98 64.67,28.45 64.67,24.38 66.7,22.35 72.06,22.35 72.92,23.22 72.92,28.35 72.44,28.83 CON1.7
OLED_DC: length 39.8
  TOP w0.152: U1.54 46.72,29.09 47.34,29.71 64.65,29.71 65.41,28.96 65.41,24.77 65.43,24.74 65.43,24.61 66.9,23.14 71.48,23.14 72.01,23.67 72.01,27 71.58,27.43 CON1.5
OLED_MOSI: length 37.9
  TOP w0.152: CON1.3 70.8,26.03 71.07,25.76 71.07,24.18 70.82,23.93 67.11,23.93 66.14,24.89 66.14,29.44 65.17,30.41 46.59,30.41 45.22,29.04 U1.57
OLED_RST: length 40.9
  TOP w0.152: U1.53 47.22,28.98 47.6,29.36 64.36,29.36 65.05,28.68 65.05,24.49 66.8,22.73 71.73,22.73 72.44,23.44 72.44,27.66 71.97,28.13 CON1.6
OLED_SCLK: length 38.7
  TOP w0.152: U1.55 46.22,29.3 46.98,30.06 64.91,30.06 65.76,29.21 65.76,24.76 67.01,23.52 71.09,23.52 71.53,23.95 71.53,26.31 71.11,26.73 CON1.4
PHA: length 6.9
  TOP w0.2: U3.3 27.2,15.95 27.71,16.46 29.17,16.46 J13.3
PHB: length 7
  TOP w0.2: U4.3 55.76,16.11 56.11,16.46 57.67,16.46 J15.3
PHC: length 7.2
  TOP w0.2: J16.2 86.4,16.43 84.94,16.43 84.48,15.97 U5.3
RX_SDA_NSS: length 36.1
  TOP w0.152: U1.30 48.22,16.6 47.14,17.68 44.17,17.68 43.22,16.72 U1.20 43.22,8.8 42.52,8.1 25.55,8.1 24.76,7.31 J6.2
SCK_ADC_EXT: length 26.9
  TOP w0.152: J6.3 26.01,7.11 26.64,7.75 42.7,7.75 43.72,8.77 U1.21
SERVO: length 53.2
  TOP w0.152: U1.58 44.72,29.48 v1(45.11,29.87) ; v1(62.79,22.43) 65.05,22.43 68,19.48 68,8.69 68.68,8 74.08,8 74.23,7.85 C34.2 R33.2
  LAYER_2 w0.152: v1(45.11,29.87) 61.29,29.87 v1(62.79,28.37)
  BOTTOM w0.152: v1(62.79,28.37) v1(62.79,22.43)
SHA: length 33.1
  TOP w0.2: 32.03,16.14 32.03,12.24 v1(31.5,11.71) ; 32.03,16.14 32.04,16.15 R11.2 ; 32.03,16.14 J13.2 29.17,16.94 27.38,16.94 26.55,16.11 U3.2
  TOP w0.3: U2.18 19.08,14.55 19.84,13.78 C6.1 v1(19.84,11.71)
  LAYER_2 w0.2: v1(31.5,11.71) v1(19.84,11.71)
SHB: length 67.2
  TOP w0.2: U4.2 55.11,16.17 55.88,16.94 57.67,16.94 J15.2 60.24,19.51 R12.2
  TOP w0.3: v1(17.03,11.71) C4.1 17.03,13.67 17.12,13.76 U2.15
  LAYER_2 w0.2: v1(60.3,11.89) 59.94,11.53 45.95,11.53 44.63,10.21 18.52,10.21 v1(17.03,11.71)
  BOTTOM w0.2: J15.2 60.3,16.37 v1(60.3,11.89)
SHC: length 95.3
  TOP w0.2: U5.2 83.83,16.11 84.63,16.92 86.35,16.92 J16.1 87.4,19 86.97,19.43 R13.2
  TOP w0.3: v1(14.2,11.71) C3.1 14.2,13.74 15.17,14.71 U2.12
  LAYER_2 w0.2: v1(85.98,11.48) 85.62,11.13 46.33,11.13 44.98,9.78 18.08,9.78 16.15,11.71 v1(14.2,11.71)
  BOTTOM w0.2: J16.1 85.98,16.55 v1(85.98,11.48)
SHUTDOWN: length 56
  TOP w0.152: U1.25 v1(45.71,16.81)
  TOP w0.2: R38.1 v1(5.08,30.1)
  LAYER_2 w0.152: v1(5.08,16.81) v1(45.71,16.81)
  BOTTOM w0.152: v1(5.08,30.1) v1(5.08,16.81)
SWCLK: length 8.8
  TOP w0.152: U1.49 v1(49.73,26.88)
  BOTTOM w0.152: J1.4 49.73,30.13 v1(49.73,26.88)
SWDIO: length 12.1
  TOP w0.152: v1(50.29,26.16) 49.71,25.58 49.71,24.05 49.88,23.88 U1.46
  BOTTOM w0.152: J1.3 48.7,31.79 50.29,30.2 v1(50.29,26.16)
TX_SCL_MOSI: length 31.4
  TOP w0.152: J6.5 28.51,6.54 29.03,7.06 43.05,7.06 44.72,8.72 U1.23 44.72,17 45.06,17.35 46.99,17.35 47.72,16.62 U1.29
UART_RX: length 48.6
  TOP w0.152: R30.2 66.95,8.03 67.64,8.71 67.64,19.37 65.22,21.79 61.93,21.79 v1(61.29,22.43) ; U1.52 47.72,28.51 48.06,28.85 v1(61.29,28.85)
  BOTTOM w0.152: v1(61.29,28.85) v1(61.29,22.43)
UART_TX: length 47.6
  TOP w0.152: U1.51 48.22,28.25 48.49,28.52 60.2,28.52 v1(60.53,28.19) ; v1(60.53,22.43) 61.49,21.46 65.05,21.46 67.26,19.25 67.26,8.99 66.88,8.61 58.65,8.61 58.08,8.04 R29.2
  BOTTOM w0.152: v1(60.53,22.43) v1(60.53,28.19)
USB_DM: length 44.2
  TOP w0.152: U1.44 52.47,22.88 52.57,22.98 65.08,22.98 68.43,19.63 68.43,8.86 68.86,8.43 76.3,8.43 76.45,8.28 76.45,5.66 76.97,5.14 79.46,5.14 79.61,4.99 R32.2
USB_DP: length 44.2
  TOP w0.152: R31.2 79.61,5.6 79.46,5.45 77.1,5.45 76.76,5.79 76.76,8.41 76.43,8.74 68.99,8.74 68.73,8.99 68.73,19.76 65.21,23.29 52.57,23.29 52.47,23.38 U1.45
VB1: length 4.8
  TOP w0.3: U2.20 20.38,14.71 21.25,13.84 C6.2 21.25,11.6 D3.1
VB2: length 4.4
  TOP w0.3: D2.1 18.43,11.55 C4.2 18.43,13.67 18.42,13.67 U2.17
VB3: length 4.7
  TOP w0.3: U2.14 16.47,14.71 15.61,13.84 C3.2 15.61,11.53 D1.1
VOLTAGE_A: length 7
  TOP w0.2: R16.2 R11.1 C19.2 36.04,16.28 38.15,18.38 U1.14
VOLTAGE_B: length 26.2
  TOP w0.2: v1(61.93,16.8) C20.2 R12.1 R18.2 ; U1.15 41.15,17.88 v1(41.71,18.44)
  LAYER_2 w0.2: v1(61.93,16.8) 57.57,16.8 55.93,18.44 v1(41.71,18.44)
VOLTAGE_C: length 55.9
  TOP w0.2: v1(43.46,22.73) 43.46,19.33 41.51,17.38 U1.16 ; v1(87.83,23.19) C21.2 R19.2 R13.1
  LAYER_2 w0.2: v1(87.83,23.19) 85.32,23.19 85.01,23.5 46.46,23.5 45.97,23.01 44.75,23.01 44.48,22.73 v1(43.46,22.73)
N223686: length 6.7
  TOP w0.2: Y1.2 34.03,24.68 35.46,23.25 C1.2 37.07,23.25 37.44,22.88 U1.5
N223706: length 6.7
  TOP w0.2: U1.6 37.47,22.38 37.1,22.01 C2.2 35.46,22.01 34.03,20.58 Y1.1
N224518: length 3
  TOP w0.2: U1.31 C16.1
N224540: length 3.7
  TOP w0.152: U1.47 C17.1
N252481: length 7.3
  TOP w0.152: U2.4 18.42,20.53 18.53,20.42 21.41,20.42 21.72,20.73 R6.1
N252485: length 2.1
  TOP w0.152: R5.1 20.73,23.03 20.38,22.68 U2.1
N252489: length 9.5
  TOP w0.152: R4.1 22.73,20.57 22.25,20.09 18.01,20.09 17.77,20.33 U2.5
N252493: length 1.9
  TOP w0.152: U2.2 R3.1
N252497: length 11.4
  TOP w0.152: R2.1 23.75,20.7 22.81,19.76 17.55,19.76 17.12,20.19 U2.6
N252501: length 2.1
  TOP w0.152: R1.1 18.72,23.03 19.08,22.68 U2.3
N258298: length 3.5
  TOP w0.2: U7.6 23.84,31.46 23.9,31.52 23.9,31.57 24.47,32.13 C23.1 25.52,32.26 L2.1
N258498: length 1.3
  TOP w0.2: R24.2 U7.4
N258502: length 2.5
  TOP w0.2: U7.3 R27.2 R25.1
N261255: length 5.3
  TOP w0.2: L1.1 C24.1 D7.1 10.48,31.28 10.39,31.37 U6.6
N261403: length 2.6
  TOP w0.2: R23.1 R26.2 U6.3
N289757: length 1.3
  TOP w0.2: R15.2 D4.2
N289807: length 1.3
  TOP w0.2: R17.2 D5.2
N289865: length 1.3
  TOP w0.2: R21.2 D6.2
N305474: length 9.3
  TOP w0.3: J2.A4B9 82.41,3.07 83.49,3.07 83.79,3.37 83.79,7.24 83.49,7.54 82.39,7.54 J2.B4A9 81.01,7.7 80.98,7.72 R28.1
N305512: length 3.7
  TOP w0.152: 81.2,4.68 81.33,4.55 J2.B7 ; 81.2,4.68 81.2,5.42 81.33,5.55 J2.A7 ; 81.2,4.68 81.07,4.55 R32.1
N305552: length 4.8
  TOP w0.152: R31.1 81.47,6.05 81.47,6.05 J2.B6 83.21,6.05 83.3,5.96 83.3,5.14 83.21,5.05 J2.A6
N321424: length 1.7
  TOP w0.152: R33.1 J4.1
N322858: length 1.9
  TOP w0.2: R29.1 J3.2
N322876: length 1.9
  TOP w0.2: R30.1 J3.3
N2979290: length 2
  TOP w0.3: R40.1 U9.1
N2979293: length 2
  TOP w0.3: R41.1 U9.4
N3596120: length 4.4
  TOP w0.152: R43.1 65.02,20.68 65.52,20.18 SW1.1
N3596121: length 2.2
  TOP w0.152: R44.1 SW1.2
N3596122: length 2.2
  TOP w0.152: R45.1 SW1.3
N3596124: length 2.2
  TOP w0.152: R46.2 SW1.5
N3596125: length 2.2
  TOP w0.152: R47.2 SW1.6
N35954610: length 15.5
  TOP w0.152: 69.9,31.63 CON1.11 66.07,31.63 65.53,31.09 R42.1

## Copper pours and planes (outline as drawn; the poured copper is in the pictures)
5V on TOP: 28.27,34.49 28.27,26.72 32.89,26.72 32.89,27.64 30.63,27.64 30.3,27.97 30.3,34.24 30.05,34.49
12V on TOP: 15.62,34.62 15.62,27.1 15.98,26.75 22.91,26.75 22.96,26.8 22.96,30.2 22.56,30.61 22.56,32 21.84,32 21.84,30.63 21.41,30.2 21.41,28.7 21.06,28.35 17.73,28.35 17.37,28.7 17.37,34.62
GND on TOP: -2.08,38.79 -2.08,-2.39 91.92,-2.39 91.92,38.79 ; 20 cut-outs
GND on BOTTOM: -1.55,38.86 -1.55,-2.36 92.2,-2.36 92.2,38.86 ; 2 cut-outs
GND on LAYER_1: -2,37 -2,-1 92,-1 92,37
GND on LAYER_2: -1.96,38.66 -1.96,-2.46 92.08,-2.46 92.08,38.66 ; 5 cut-outs
VIN on TOP: 3.58,29.54 7.47,29.54 8.26,30.33 8.26,31.95 8.94,31.95 8.94,27.97 1.52,27.97 1.35,28.14 1.35,29.92 1.52,30.1 3.02,30.1
N258294 on TOP: 22.78,34.72 24.56,34.72 24.79,34.49 24.79,32.94 24.13,32.94 23.47,33.6 22.78,33.6
N258298 on TOP: 22.78,32.05 23.62,32.05 24.23,32.66 26.24,32.66 26.24,31.14 25.93,30.84 22.78,30.84
N261255 on TOP: 9.25,31.98 10.39,31.98 10.77,32.36 10.77,33.27 13.39,33.27 13.39,31.09 13.03,30.73 9.35,30.73 9.25,30.84
N2612190 on TOP: 9.25,34.62 11.71,34.62 11.71,33.81 10.13,33.81 9.83,33.5 9.25,33.5

## Text on the board
Ref Des/Silkscreen Top: CANL | CANH | CLK DIO GND 3V3 | HALL | C | B | A | TX | RX | D | 0.78 OLED | 67373
